# Altium PCB PCB2.PcbDoc
Units mil, origin at the board's own origin, x right, y up, seen from the top; angles counter-clockwise.
Board outline 1574.8 x 1400.79 mil, 4 copper layers (Top Layer, PWR02, GND03, Bottom Layer), stack 30.634 mil thick; 65 components, 63 nets, 285 pads, 63 vias.
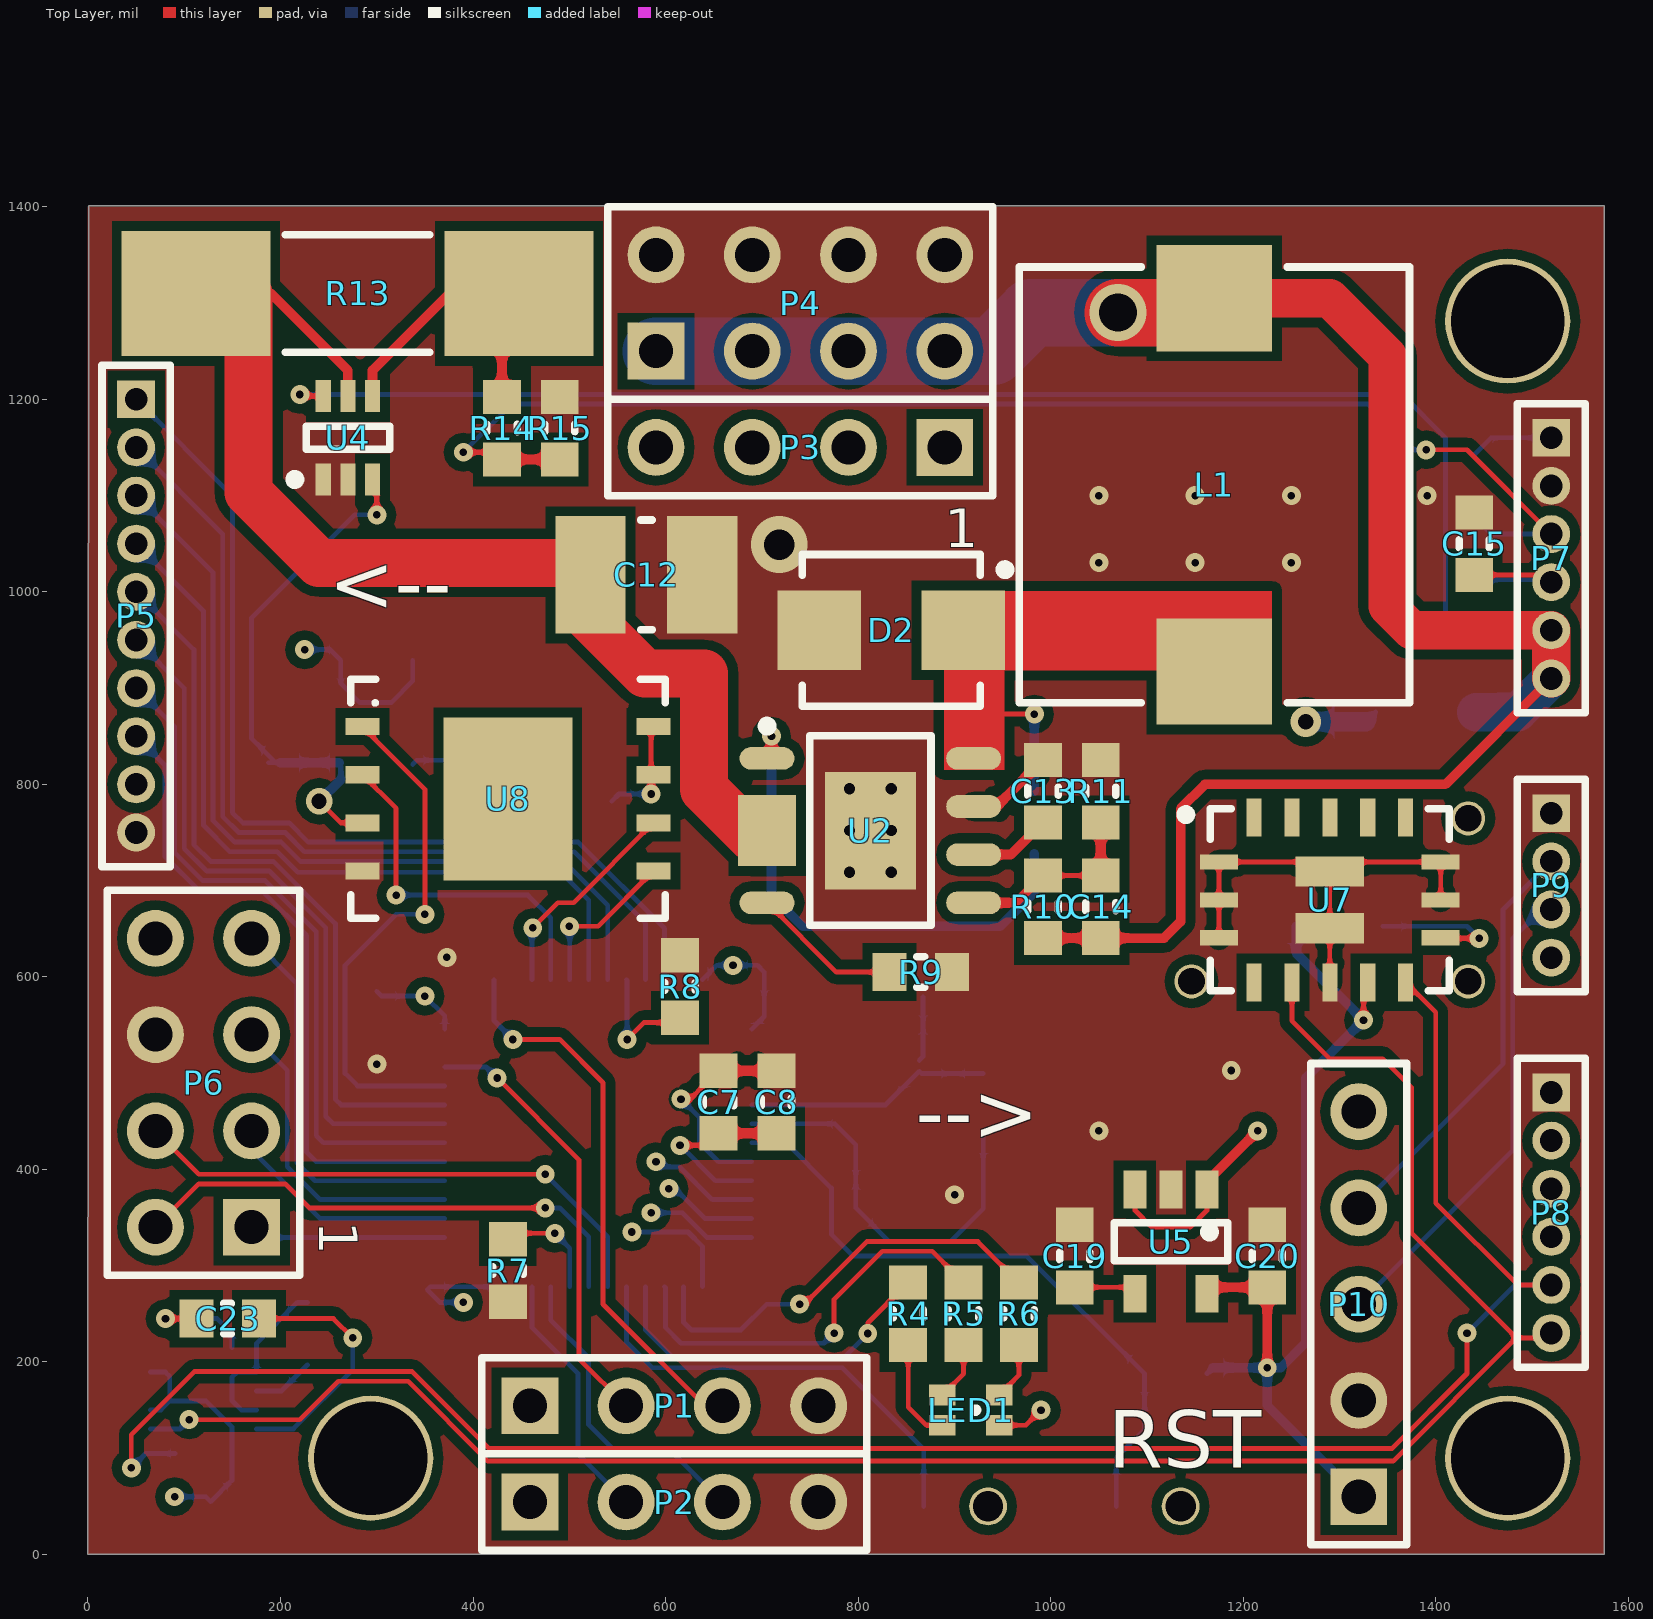
[diagram p0: Top Layer view]
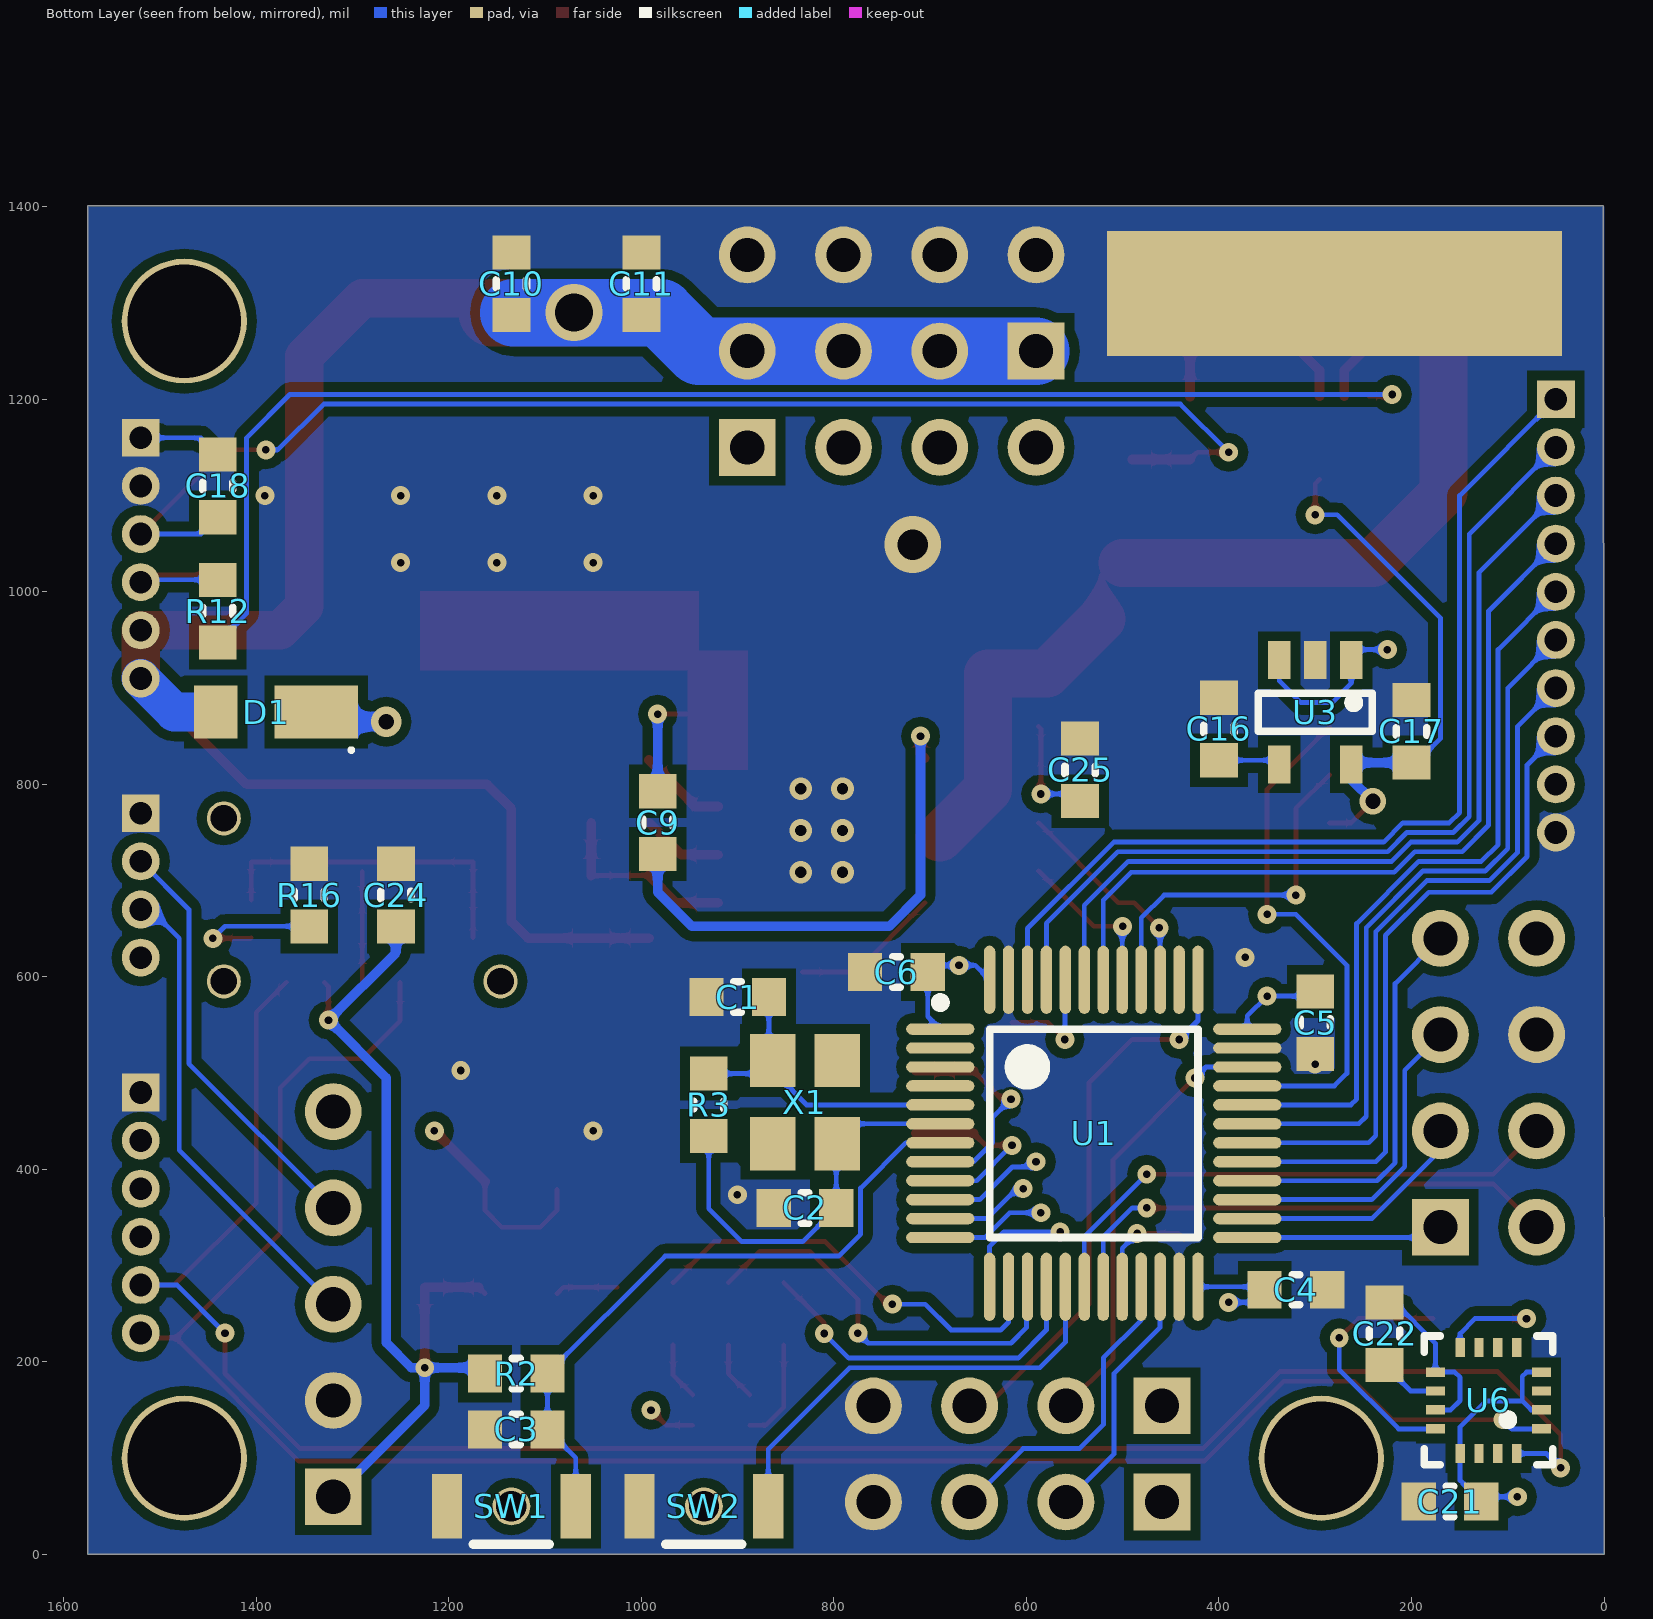
[diagram p1: Bottom Layer view, seen from below]
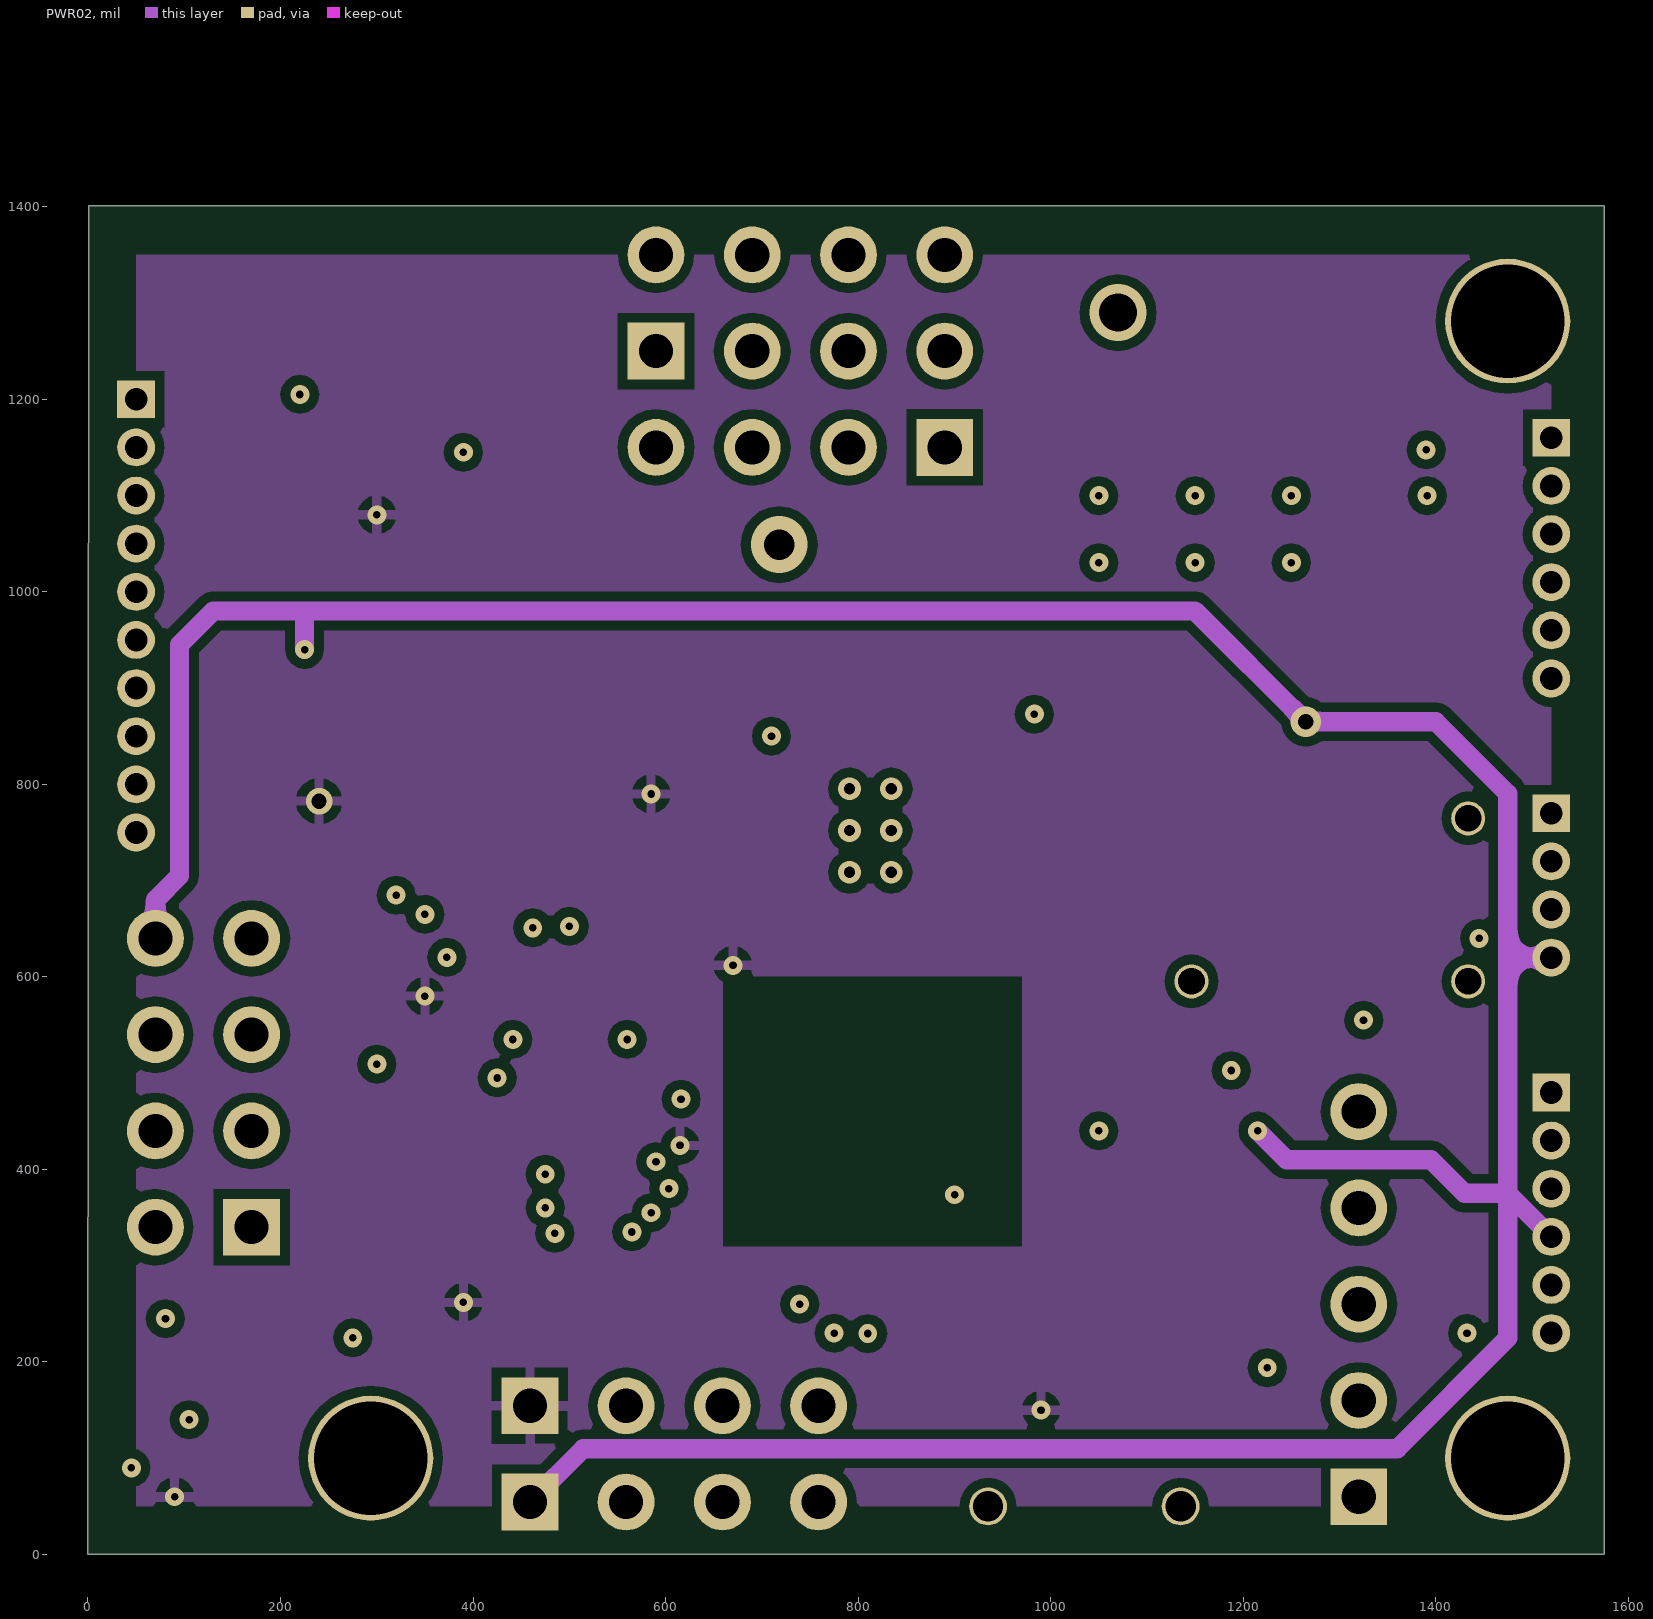
[diagram p2: PWR02]
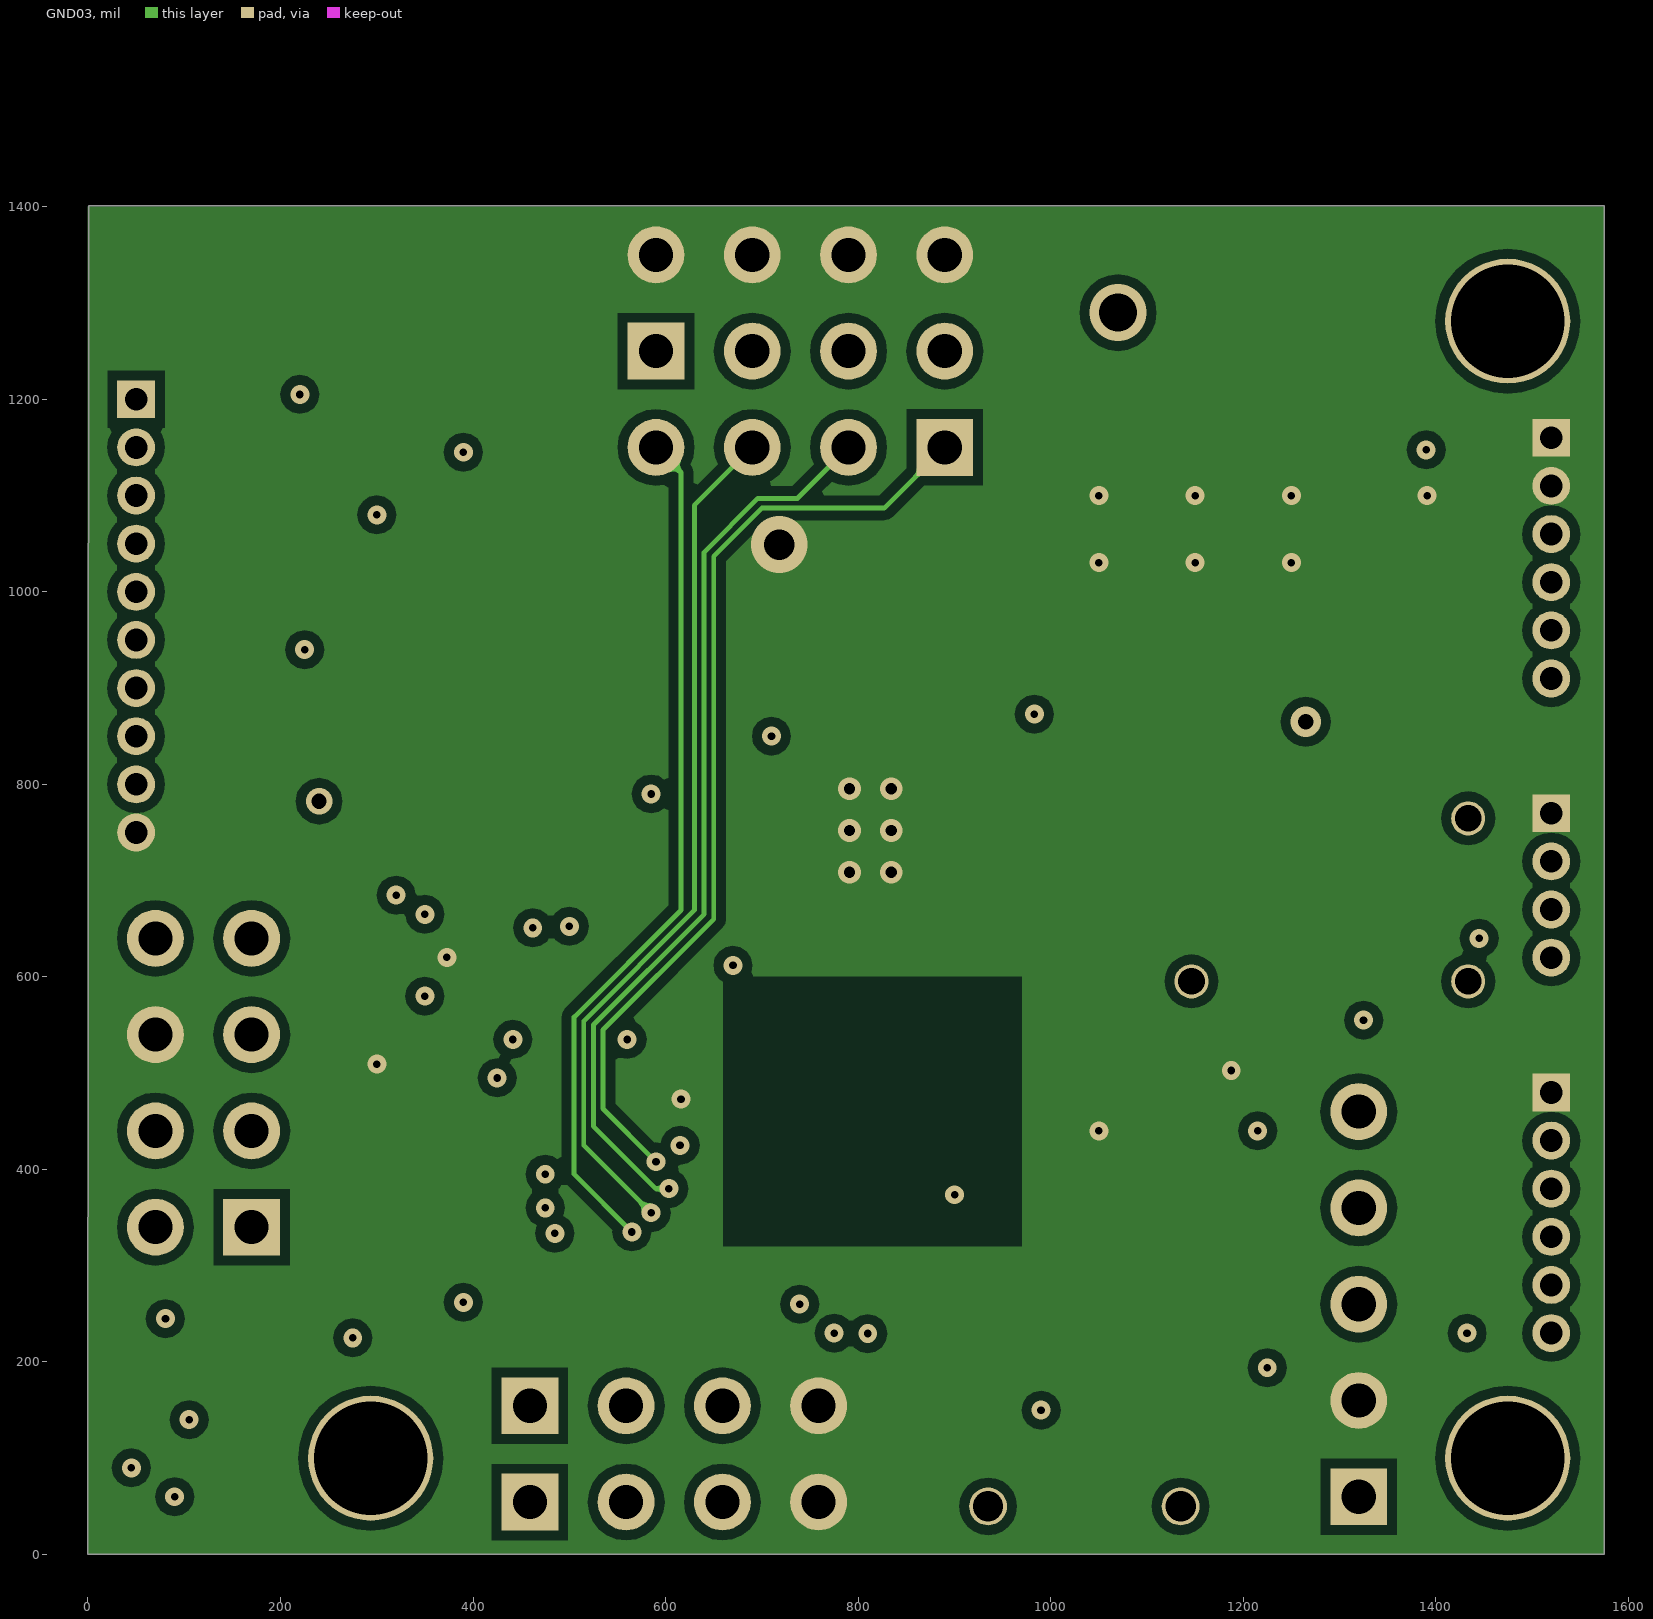
[diagram p3: GND03]

## Layer stack, top to bottom
Top Solder: solder mask 0.4, Solder Resist, Dk 3.5
Top Layer: signal copper 1.4
Dielectric 1: core 10, FR-4, Dk 4.2
PWR02: signal copper 1.417
Dielectric 3: prepreg 5, Dk 4.2
GND03: signal copper 1.417
Dielectric 2: core 10, Dk 4.2
Bottom Layer: signal copper 1.4
Bottom Solder: solder mask 0.4, Solder Resist, Dk 3.5

## Board outline
0,0 1574.8,0 1574.8,1400.79 0.79,1400.79

## Design rules (kind name [scope] priority, off if disabled: settings)
Clearance [All] p1: gap=5 ignorepadtopadclearanceinfootprint=FALSE except(0: Arc-Hole Track-Hole SMDPad-Hole THPad-Hole Via-Hole Fill-Hole Poly-Hole Region-Hole Text-Hole; 10: Arc-Fill Arc-Poly Arc-Region Track-Fill Track-Poly Track-Region SMDPad-Fill SMDPad-Poly SMDPad-Region THPad-Fill THPad-Poly THPad-Region Via-Fill Via-Poly Via-Region Fill-Fill Fill-Poly Fill-Region Poly-Poly Poly-Region Region-Region)
PolygonConnect PolygonConnect_2 [All vs IsNamedPolygon('Top Layer-GND') Or  IsNamedPolygon('Bottom Layer-GND')] p1: connectstyle=Direct reliefconductorwidth=10 reliefentries=4 polygonreliefangle="90 Angle" airgapwidth=10
PolygonConnect PolygonConnect_1 [All vs IsNamedPolygon('GND03-GND')] p2: connectstyle=Direct reliefconductorwidth=10 reliefentries=4 polygonreliefangle="90 Angle" airgapwidth=10
PolygonConnect [All] p3: connectstyle=Relief reliefconductorwidth=10 reliefentries=4 polygonreliefangle="90 Angle" airgapwidth=10
RoutingVias [All] p1: holewidth=7.87 width=19.68 viastyle="Through Hole" minholewidth=7.87 minwidth=19.68 maxholewidth=78.74 maxwidth=118.11
SolderMaskExpansion [All] p1: expansion=4
Width [All] p1: maxlimit=200 minlimit=5 preferedwidth=20 toplayer_prefwidth=5 midlayer1_maxwidth=50 midlayer2_maxwidth=50 midlayer2_prefwidth=5 bottomlayer_prefwidth=5 minimp=50.000000 maximp=50.000000 favimp=50.000000
30 further rules are at their usual default settings.

## Components (designator, comment, footprint, x,y, rotation, side; value= is the part's Value field where it differs from the comment)
C1 "20pF" 0603 900,579.02 r0 bottom
C2 "20pF" 0603 830,360 r0 bottom
C3 "1uF" 0603 1130,130 r0 bottom
C4 "100nF" 0603 320,275 r0 bottom
C5 "100nF" 0603 300,552.52 r90 bottom
C6 "100nF" 0603 735,605 r180 bottom
C7 "100nF" 0603 655,470 r90 top
C8 "10uF" 0603 715,470 r90 top
C9 "100nF" 0603 983,760.31 r90 bottom
C10 "22uF" 0603 1135,1320 r270 bottom
C11 "22uF" 0603 1000,1320 r270 bottom
C12 "10uF" 1210 580,1017.52 r180 top
C13 "8.2nF" 0603 992,792.79 r270 top
C14 "330pF" 0603 1052,672.79 r270 top
C15 "1uF" 0603 1440,1050 r90 top
C16 "470pF" 0603 400,857.52 r270 bottom
C17 "2.2uF" 0603 200,855 r270 bottom
C18 "100nF" 0603 1440,1110 r270 bottom
C19 "470pF" 0603 1025,310 r270 top
C20 "2.2uF" 0603 1225,310 r270 top
C21 "100nF" 0603 160,55 r0 bottom
C22 "4.7uF" 0603 228,229.39 r270 bottom
C23 "0.22uF" 0603 145,245 r0 top
C24 "100nF" 0603 1255,685 r90 bottom
C25 "100nF" 0603 544.14,815 r270 bottom
D1 "DFLS130L-7" PowerDI123 1380,875 r0 bottom
D2 "SK1045B" "SMB (DO-214AA)" 834.37,960 r0 top
L1 "Inductor" Ind1040 1170,1111 r90 top
LED1 "RGB_CA" RGB1.6*1.6 917,150 r90 top
P1 "Header 4" HDR1X4 459,154.47 r0 top
P2 "Header 4" HDR1X4 459,54.47 r0 top
P3 "Header 4" HDR1X4 890,1150 r180 top
P4 "Header 4X2" HDR2X4 590,1250 r0 top
P5 "MHDR1X10" MHDR1X10 50,1200 r270 top
P6 "Header 4X2" HDR2X4 170,340 r90 top
P7 "MHDR1X6" MHDR1X6 1520,1160 r270 top
P8 "MHDR1X6" MHDR1X6 1520,480 r270 top
P9 "MHDR1X4" MHDR1X4 1520,770 r270 top
P10 "Header 5" HDR1X5 1320,60 r90 top
R2 "10k" 0603 1130,187.86 r0 bottom
R3 "1M" 0603 930,467.05 r90 bottom
R4 "1k" 0603 852,250 r90 top
R5 "1k" 0603 909.52,250 r90 top
R6 "1k" 0603 967,250 r90 top
R7 "10k" 0603 436.18,295 r270 top
R8 "10k" 0603 615,590 r270 top
R9 "20k" 0603 865,605 r180 top
R10 "91k" 0603 992,672.79 r270 top
R11 "15k" 0603 1052,792.79 r270 top
R12 "680" 0603 1440,980 r90 bottom
R13 "1mR" 2512 280,1310 r180 top
R14 "4.7k" 0603 430,1170 r90 top
R15 "1k" 0603 490,1170 r270 top
R16 "0R" 0603 1345,685 r270 bottom
SW1 "Btn" BTN_B3U_B 1135,50 r0 bottom
SW2 "Btn" BTN_B3U_B 935,50 r0 bottom
U1 "STM32F103C8T6" LQFP48_N 530,437.52 r180 bottom
U2 "LMR14030 EZ" SOP8-Pad 812.72,752 r0 top
U3 "MIC5219" SOT23-5 300,874.88 r270 bottom
U4 "INA190" SC70 270,1160 r90 top
U5 "MIC5219" SOT23-5 1125,325 r270 top
U6 "QMC5883L" QMC5883 120,160 r0 bottom
U7 "SDP3x_D" SDP3x 1290,680 r0 top
U8 "W25Q128VE" WSON8-8x6mm 436.18,785 r0 top
X1 "8M" XTAL-3225-4 830,470 r90 bottom

## Footprints (in the part's own frame and the unit in brackets; to place one, negate y for a bottom-side part, rotate by r counter-clockwise, add the part's x,y. Pads: shape width x height; smd on the part's side, far side on the other; paste and mask are expansions set on the pad)
0603 [mm]
  rect 0.9x1 smd: 1(-0.825,0) 2(0.825,0)
  silkscreen extent -0.1,-0.4 0.1,0.4
1210 [mm]
  rect 1.85x3.1 smd: 1(-1.475,0) 2(1.475,0)
  silkscreen extent -0.15,-1.45 0.15,1.45
2512 [mm]
  rect 1.15x3.3 smd: 1(-2.875,0) 2(2.875,0)
  silkscreen extent -1.9,-1.55 1.9,1.55, body extent -3.3,-1.7 3.3,1.7, height 0.65
BTN_B3U_B [mm]
  rect 0.8x1.7 smd: 1(-1.7,0) 2(1.7,0)
  round 1 hole 0.8: ""(0,0)
  silkscreen extent -1,1 1,1
HDR1X4 [mm] "Connector; Header; 4 Position"
  rect 1.5x1.5 hole 0.9: 1(0,0)
  round 1.5 hole 0.9: 2(2.54,0) 3(5.08,0) 4(7.62,0)
  silkscreen extent -1.27,-1.27 8.89,1.27
HDR1X5 [mm] "Connector; Header; 5 Position"
  rect 1.5x1.5 hole 0.9: 1(0,0)
  round 1.5 hole 0.9: 2(2.54,0) 3(5.08,0) 4(7.62,0) 5(10.16,0)
  silkscreen extent -1.27,-1.27 11.43,1.27
HDR2X4 [mm] "Connector; Header; 4x2 Position"
  rect 1.5x1.5 hole 0.9: 1(0,0)
  round 1.5 hole 0.9: 2(0,2.54) 3(2.54,0) 4(2.54,2.54) 5(5.08,0) 6(5.08,2.54) 7(7.62,0) 8(7.62,2.54)
  silkscreen extent -1.27,-1.27 8.89,3.81
Ind1040 [mm] "Inductor 11.5*10*4"
  rect 2.8x3.05 smd: 1(-4.925,0) 2(4.925,0)
  silkscreen extent -5.75,-5.15 5.75,5.15
LQFP48_N [mm] "Thin QFP, 48-Leads, Body 7x7mm, Pitch 0.5mm, IPC Medium Density"
  oval 1.8x0.3 smd: 1(-4.05,2.75) 2(-4.05,2.25) 3(-4.05,1.75) 4(-4.05,1.25) 5(-4.05,0.75) 6(-4.05,0.25) 7(-4.05,-0.25) 8(-4.05,-0.75) 9(-4.05,-1.25) 10(-4.05,-1.75) 11(-4.05,-2.25) 12(-4.05,-2.75) 25(4.05,-2.75) 26(4.05,-2.25) 27(4.05,-1.75) 28(4.05,-1.25) 29(4.05,-0.75) 30(4.05,-0.25) 31(4.05,0.25) 32(4.05,0.75) 33(4.05,1.25) 34(4.05,1.75) 35(4.05,2.25) 36(4.05,2.75)
  oval 0.3x1.8 smd: 13(-2.75,-4.05) 14(-2.25,-4.05) 15(-1.75,-4.05) 16(-1.25,-4.05) 17(-0.75,-4.05) 18(-0.25,-4.05) 19(0.25,-4.05) 20(0.75,-4.05) 21(1.25,-4.05) 22(1.75,-4.05) 23(2.25,-4.05) 24(2.75,-4.05) 37(2.75,4.05) 38(2.25,4.05) 39(1.75,4.05) 40(1.25,4.05) 41(0.75,4.05) 42(0.25,4.05) 43(-0.25,4.05) 44(-0.75,4.05) 45(-1.25,4.05) 46(-1.75,4.05) 47(-2.25,4.05) 48(-2.75,4.05)
  silkscreen extent -4.18,-2.75 2.75,3.57, body extent -3.5,-3.5 3.5,3.5, height 1.6
MHDR1X4 [mm] "Connector; Header; 4 Position"
  rect 1x1 hole 0.6: 1(0,0)
  round 1 hole 0.6: 2(1.27,0) 3(2.54,0) 4(3.81,0)
  silkscreen extent -0.9,-0.9 4.71,0.9
MHDR1X6 [mm] "Connector; Header; 6 Position"
  rect 1x1 hole 0.6: 1(0,0)
  round 1 hole 0.6: 2(1.27,0) 3(2.54,0) 4(3.81,0) 5(5.08,0) 6(6.35,0)
  silkscreen extent -0.9,-0.9 7.25,0.9
MHDR1X10 [mm] "Connector; Header; 10 Position"
  rect 1x1 hole 0.6: 1(0,0)
  round 1 hole 0.6: 2(1.27,0) 3(2.54,0) 4(3.81,0) 5(5.08,0) 6(6.35,0) 7(7.62,0) 8(8.89,0) 9(10.16,0) 10(11.43,0)
  silkscreen extent -0.9,-0.9 12.33,0.9
PowerDI123 [mm] "SODFL, 2-Leads, Body 1.78x3.70mm, IPC Medium Density"
  rect 1.15x1.4 smd: 1(1.575,0)
  rect 2.2x1.4 smd: 2(-1.075,0)
  silkscreen extent -2.05,0.95 -1.95,1.05
QMC5883 [mm]
  rect 0.5x0.25 smd: 1(-1.4,0.75) 2(-1.4,0.25) 3(-1.4,-0.25) 4(-1.4,-0.75) 9(1.4,-0.75) 10(1.4,-0.25) 11(1.4,0.25) 12(1.4,0.75)
  rect 0.25x0.5 smd: 5(-0.75,-1.4) 6(-0.25,-1.4) 7(0.25,-1.4) 8(0.75,-1.4) 13(0.75,1.4) 14(0.25,1.4) 15(-0.25,1.4) 16(-0.75,1.4)
  silkscreen extent -1.7,-1.7 1.7,1.7, body extent -1.55,-1.55 1.55,1.55, height 0.95
RGB1.6*1.6 [mm]
  rect 0.55x0.7 smd: 1(-0.4,0.75) 2(0.4,0.75) 3(0.4,-0.75) 4(-0.4,-0.75)
  silkscreen extent -0.08,-0.2 0.08,-0.05
SC70 [mm]
  rect 0.85x0.4 smd: 1(-1.1,0.65) 2(-1.1,0) 3(-1.1,-0.65) 4(1.1,-0.65) 5(1.1,0) 6(1.1,0.65)
  silkscreen extent -1.22,-1.1 0.3,1.52, body extent -1.2,-1.07 1.2,1.07, height 1.1
SDP3x [mm] "QFN, 16-Leads, Body 6.00x4.50mm, Pitch 1.00mm, Thermal Pad 1.80x2.60mm, IPC Low Density"
  rect 1x0.4 smd: 1(-2.925,1) 2(-2.925,0) 3(-2.925,-1) 9(2.925,-1) 10(2.925,0) 11(2.925,1)
  rect 0.4x1 smd: 4(-2,-2.175) 5(-1,-2.175) 6(0,-2.175) 7(1,-2.175) 8(2,-2.175) 12(2,2.175) 13(1,2.175) 14(0,2.175) 15(-1,2.175) 16(-2,2.175)
  round 0.9 hole 0.7: ""(-3.65,-2.15) ""(3.65,-2.15) ""(3.65,2.15)
  rect 1.8x0.8 smd: ""(0,-0.75) ""(0,0.75)
  silkscreen extent -3.92,-2.4 3.15,2.4
"SMB (DO-214AA)" [mm] "Molded Diode, 2-Leads, Body 4.38x3.62mm, IPC Medium Density"
  rect 2.2x2.1 smd: 1(-1.9,0) 2(1.9,0)
  silkscreen extent -2.35,-2 3.13,2, body extent -2.35,-1.97 2.35,1.97, height 2.4
SOP8-Pad [mm]
  oval 1.45x0.6 smd: 1(-2.725,1.905) 2(-2.725,0.635) 3(-2.725,-0.635) 4(-2.725,-1.905) 5(2.725,-1.905) 6(2.725,-0.635) 7(2.725,0.635) 8(2.725,1.905)
  rect 2.4x3.1 smd: 9(0,0)
  silkscreen extent -2.85,-2.5 1.6,2.88
SOT23-5 [mm] "SOT23, 5-Leads, Body 2.90x2.80mm, Pitch 0.95mm, IPC Medium Density"
  rect 1x0.6 smd: 1(-1.375,0.95) 2(-1.375,0) 3(-1.375,-0.95) 4(1.375,-0.95) 5(1.375,0.95)
  silkscreen extent -0.5,-1.5 0.5,1.5
WSON8-8x6mm [mm]
  rect 0.9x0.45 smd: 1(-3.84,1.905) 2(-3.84,0.635) 3(-3.84,-0.635) 4(-3.84,-1.905) 5(3.84,-1.905) 6(3.84,-0.635) 7(3.84,0.635) 8(3.84,1.905)
  rect 3.4x4.3 smd paste-1.7: 9(0,0)
  silkscreen extent -4.15,-3.15 4.15,3.15
XTAL-3225-4 [mm]
  rect 1.4x1.2 smd: 1(-1.1,-0.85) 2(1.1,0.85) ""(-1.1,0.85) ""(1.1,-0.85)

## Part data
C1 C2 C3 C4 C5 C6 C7 C8 C9 C10 C11 C12 C13 C14 C15 C16 C17 C18 C19 C20 C21 C22 C23 C24 C25: library part Cap
D1 D2: library part Diode
P1 P2 P3 P9: "Header, 4-Pin", LatestRevisionDate=17-Jul-2002, LatestRevisionNote="Re-released for DXP Platform.", Publisher="Altium Limited"
P4 P6: "Header, 4-Pin, Dual row", LatestRevisionDate=17-Jul-2002, LatestRevisionNote="Re-released for DXP Platform.", Publisher="Altium Limited"
P5: "Header, 10-Pin", LatestRevisionDate=17-Jul-2002, LatestRevisionNote="Re-released for DXP Platform.", Publisher="Altium Limited"
P7 P8: "Header, 6-Pin", LatestRevisionDate=17-Jul-2002, LatestRevisionNote="Re-released for DXP Platform.", Publisher="Altium Limited"
P10: "Header, 5-Pin", LatestRevisionDate=17-Jul-2002, LatestRevisionNote="Re-released for DXP Platform.", Publisher="Altium Limited"
R2 R3 R4 R5 R6 R7 R8 R9 R10 R11 R12 R13 R14 R15 R16: library part Res
U1: "STM32 ARM-based 32-bit MCU with 64 Kbytes Flash, 48-pin LQFP, Industrial Temperature", ComponentLink1Description="Manufacturer Link", ComponentLink1URL=www.st.com/stm32, ComponentLink2Description=Datasheet, ComponentLink2URL=http://www.st.com/stonline/products/literature/ds/13587.pdf, DatasheetVersion="rev6, Mar-2008", PackageDescription="48-Pin Low-Profile Quad Flat Pack, 7 x 7 mm Body, 0.5 mm Pitch (LQFP48)", PackageReference=LQFP48, PackageVersion=Mar-2008, Published=30-May-2008, Publisher="Altium Limited"
U8: library part W25QxxxVE/A
X1: library part XTAL

## Free pads (board coordinates)
  rect 472.44x129.92 smd far side: 2(280,1310)
  rect 60x74 smd: 3(705.43,752)
  rect 129.92x129.92 smd: ""(100,1310) ""(460,1310)
  round 129.92 hole 118.11: ""(293.7,100) ""(1474.8,100) ""(1474.8,1281.1)

## Via types
v1: diameter 19.68, hole 7.87, Top Layer to Bottom Layer, tented both sides, 53 vias
v2: diameter 23.62, hole 11.81, Top Layer to Bottom Layer, tented both sides, 6 vias
v3: diameter 59.06, hole 31.5, Top Layer to Bottom Layer, tented both sides, 1 vias
v4: diameter 27.56, hole 15.75, Top Layer to Bottom Layer, tented both sides, 1 vias
v5: diameter 31.5, hole 15.75, Top Layer to Bottom Layer, tented both sides, 1 vias
v6: diameter 59.06, hole 39.37, Top Layer to Bottom Layer, tented both sides, 1 vias

## Nets (pads, with @x,y where several pads share a name; then routed paths per layer and width w, separated by ;. In a path a pad name is that pad's centre, name@x,y a point inside that pad or via, vN(x,y) a via of type N, cw(c..) or ccw(c..) an arc to the next point about the centre after c; other vN are vias at no path point)
+5: D1.2 P2.1 P6.8 P8.4 P9.4 U3.1 U3.3 U5.1 U5.3 | length 4348.2
  Top Layer w5: U5.3 1087.6,357.4 1105,340 1145,340 1162.4,357.4 U5.1 U5.1@1162.4,387.4
  Top Layer w10: U5.1@1162.4,387.4 v1(1215,440)
  PWR02 w20: P6.8 70,680 95,705 95,945 130,980 225,980 ; v1(225,940) 225,980 ; P2.1 514.47,109.94 1359.94,109.94 1474.8,224.8 1474.8,375.2 ; v1(1215,440) 1245,410 1395,410 1429.8,375.2 1474.8,375.2 ; P8.4 1474.8,375.2 ; P9.4 1474.8,620 ; 225,980 1150,980 v5(1265,865) 1400,865 1474.8,790.2 1474.8,620 ; 1474.8,375.2 1474.8,620
  Bottom Layer w5: v1(225,940) 251.61,940 U3.1 262.6,904.88 282.48,885 315,885 337.4,907.4 U3.3 ; D1.2@1327.68,865 D1.2
  Bottom Layer w20: v5(1265,865) D1.2@1327.68,865
+5.3: C10.2 C11.2 C14.2 D1.1 L1.2 P4.1 P4.3 P4.5 P4.7 P7.5 P7.6 R10.2 | length 2164.7
  Top Layer w10: R10.2 C14.2 1117.79,640.31 1135,657.52 1135,774.82 1160.18,800 1410,800 P7.6 ; L1.2@1155.1,1290 L1.2
  Top Layer w40: L1.2 1289.9,1304.9 1350,1244.8 1350,985 1375,960 P7.5 P7.6
  Top Layer w70: v6(1070,1290) L1.2@1155.1,1290
  Bottom Layer w10: C10.2@1132.52,1290 C10.2
  Bottom Layer w40: D1.1 1485,875 P7.6
  Bottom Layer w70: P4.1 P4.3 P4.5 P4.7 940,1250 980,1290 v6(1070,1290) C10.2@1132.52,1290
ADC1: P6.4 U1.18 | length 567.4
  Top Layer w5: P6.4 115,395 v1(475,395)
  Bottom Layer w5: v1(475,395) 539.84,330.16 U1.18
ADC2: P6.2 U1.19 | length 543.4
  Top Layer w5: P6.2 115,385 205,385 230,360 v1(475,360)
  Bottom Layer w5: v1(475,360) 490,360 520.16,329.84 U1.19
BAT_IN: pad.@460,1310 R13.1 R14.2 U4.4 | length 277.4
  Top Layer w10: U4.4 295.59,1230 375.59,1310 R13.1 ; R14.2 430,1280 pad.@460,1310
BAT_OUT: C12.2 pad.3 pad.@100,1310 R13.2 U2.2 U2.3 U4.5 | length 1111.4
  Top Layer w5: C12.2@521.93,971.73 C12.2
  Top Layer w10: R13.2 190,1310 270,1230 U4.5
  Top Layer w50: R13.2 166.81,1103.19 240,1030 C12.2@500,1030 ; C12.2@521.93,971.73 578.66,915 640,915 640.08,914.92 640.08,794.92 pad.3@690,745
CS: U1.33 U8.1 | length 548.1
  Top Layer w5: U8.1 350,795 v1(350,665)
  Bottom Layer w5: v1(350,665) 320,665 267.03,612.03 267.03,499.7 280,486.73 U1.33
GND: C1.2 C2.2 C3.2 C4.1 C5.1 C6.1 C7.2 C8.2 C10.1 C11.1 C12.1 C13.1 C15.2 C16.1 C17.1 C18.1 C19.1 C20.1 C21.2 C22.1 C24.2 C25.1 D2.1 P1.4 P2.4 P4.2 P4.4 P4.6 P4.8 P5.10 P6.6 P7.1 P7.2 P8.1 P9.1 P10.2 pad.2 R7.2 R8.1 R9.1 R11.1 R15.1 R16.1 SW1.2 SW2.2 U1.8 U1.23 U1.35 U1.47 U2.7 U2.9 U3.2 U4.1 U4.2 U5.2 U6.9 U6.11 U7.1 U7.2 U7.3 U7.6 U7.10 U7.11 U7.@1290,650.47 U7.@1290,709.53 U8.4 | length 1051.6
  Top Layer w5: v1(616.03,472.97) 625.49,472.97 C7.2 ; U7.3 U7.2 U7.1 U7.11 U7.10 ; U7.6 1290,650.47 U7.@1290,709.53
  Top Layer w10: C7.2 C8.2 ; U2.7 943.73,777 C13.1
  Bottom Layer w5: U6.11 159.32,150.16 149.53,159.94 149.53,184.06 155,189.53 U6.9 175.12,219.53 217.46,261.87 C22.1 ; v1(616.03,472.97) 635,454 635,427.97 654.98,407.99 U1.8 ; C18.1 1457.52,1160 P7.1
  other v1: 900.32,373.69 1050,440.07 1187.59,502.74 300,509.31 372.73,620.18 1050,1030.23 1150,1030.23 1250,1030.23 1050,1100 1150,1100 1250,1100 1390.98,1100
  other v2: 791.06,708.69 834.37,708.69 791.06,752 834.37,752 791.06,795.31 834.37,795.31
  other v3: 718,1049
GPIO1: P6.1 U1.25 | length 205
  Bottom Layer w5: P6.1 180.75,329.25 U1.25
GPIO2: P6.3 U1.26 | length 250
  Bottom Layer w5: P6.3 170,420 241.06,348.94 U1.26
GPIO3: P6.5 U1.27 | length 330.1
  Bottom Layer w5: P6.5 207.03,502.97 207.03,402.97 241.38,368.62 U1.27
GPIO4: P6.7 U1.28 | length 413.7
  Bottom Layer w5: P6.7 217.03,592.97 217.03,407.11 235.84,388.31 U1.28
IOUT: C15.1 P7.4 R12.2 | length 164.1
  Top Layer w5: C15.1 1512.48,1017.52 P7.4
  Bottom Layer w5: R12.2 1517.52,1012.48 P7.4
KEY: SW2.1 U1.17 | length 471.6
  Bottom Layer w5: U1.17 559.53,220.47 586,194 783.62,194 868.07,109.55 SW2.1
LED1: R4.2 U1.16 | length 368.7
  Top Layer w5: v1(810,229.53) 810,240.48 R4.2
  Bottom Layer w5: U1.16 579.21,233.17 608.39,204 784.47,204 v1(810,229.53)
LED2: R5.2 U1.15 | length 432.7
  Top Layer w5: v1(775,230) 775,265 825,315 877,315 R5.2
  Bottom Layer w5: U1.15 600,276.97 600,235.55 616.03,219.53 764.53,219.53 v1(775,230)
LED3: R6.2 U1.14 | length 449.3
  Top Layer w5: v1(739.19,260) 739.19,256.81 740,256 809,325 924.48,325 R6.2
  Bottom Layer w5: U1.14 618.58,241.42 626.83,233.17 678.17,233.17 705,260 v1(739.19,260)
MISO: U1.40 U8.2 | length 374.4
  Top Layer w5: U8.2 320,775 v1(320,685)
  Bottom Layer w5: v1(320,685) 457,685 480.79,661.21 U1.40
MOSI: U1.41 U8.5 | length 166.9
  Top Layer w5: v1(500,652.52) 529.88,652.52 U8.5
  Bottom Layer w5: v1(500,652.52) 500.47,652.05 U1.41
NetC9_1: C9.1 U2.1 | length 530.9
  Top Layer w10: U2.1 710,831.57 v1(710,850)
  Bottom Layer w10: v1(710,850) 710,685 742.48,652.52 947.52,652.52 983,688 C9.1
NetC9_2: C9.2 D2.2 L1.1 U2.8 | length 135.2
  Top Layer w5: 928,873 v1(983,873)
  Bottom Layer w10: C9.2 v1(983,873)
NetC13_2: C13.2 U2.6 | length 85.8
  Top Layer w10: U2.6 958.69,727 C13.2
NetC14_1: C14.1 R10.1 R11.2 U2.5 | length 198.7
  Top Layer w5: R10.1 C14.1
  Top Layer w10: U2.5 963.73,677 R10.1 ; C14.1 R11.2
NetC16_2: C16.2 U3.4 | length 64.4
  Bottom Layer w5: U3.4 341.69,825.04 C16.2
NetC19_2: C19.2 U5.4 | length 65.4
  Top Layer w5: C19.2 1080.95,277.52 U5.4
NetC22_2: C22.2 U6.10 | length 64.1
  Bottom Layer w5: U6.10 200.93,169.84 C22.2
NetC23_1: C23.1 U6.8 | length 121.9
  Top Layer w5: v1(80.47,245) C23.1
  Bottom Layer w5: v1(80.47,245) 134.06,245 149.53,229.53 U6.8
NetC23_2: C23.2 U6.12 | length 264.2
  Top Layer w5: C23.2 255,245 v1(275,225)
  Bottom Layer w5: U6.12 213.44,130.47 275,192.03 v1(275,225)
NetLED1_1: LED1.1 R4.1 | length 107.8
  Top Layer w5: R4.1 852,153 870.75,134.25 LED1.1
NetLED1_2: LED1.2 R5.1 | length 60.9
  Top Layer w5: LED1.2 909.52,187.8 R5.1
NetLED1_3: LED1.3 R6.1 | length 60.3
  Top Layer w5: LED1.3 967,186.22 R6.1
NetR7_1: R7.1 U1.20 | length 113.3
  Top Layer w5: R7.1 442.33,333.63 v1(485,333.63)
  Bottom Layer w5: v1(485,333.63) 500.47,318.15 U1.20
NetR8_2: R8.2 U1.44 | length 124.4
  Top Layer w5: v1(560,535) 577.52,552.52 R8.2@615,552.52
  Bottom Layer w5: U1.44 560,596.5 v1(560,535)
NetR9_2: R9.2 U2.4 | length 156.9
  Top Layer w5: U2.4 777.43,605 R9.2
NetR12_1: R12.1 U4.6 | length 1458.7
  Top Layer w5: v1(220,1205) 221.69,1203.31 U4.6
  Bottom Layer w5: v1(220,1205) 1365,1205 1410,1160 1410,977.52 R12.1
NetR16_2: R16.2 U7.9 | length 145.3
  Top Layer w5: U7.9 1405.79,640 v1(1445,640)
  Bottom Layer w5: R16.2 1432.48,652.52 v1(1445,640)
OSC_IN: C1.1 R3.2 U1.5 X1.2 | length 323.5
  Bottom Layer w5: U1.5 828.44,467.05 863.46,502.07 866,499.53 R3.2 ; X1.2 867.52,517.36 C1.1
OSC_OUT: C2.1 R3.1 U1.6 X1.1 | length 419.2
  Bottom Layer w5: U1.6 775.87,447.36 X1.1 797.52,425.71 C2.1 832.52,325 895.75,325 930,359.25 R3.1
PWM_IN1: P5.8 U1.29 | length 691.1
  Bottom Layer w5: P5.8 80,820 80,725 117,688 182,688 227.03,642.97 227.03,417.97 237.01,407.99 U1.29
PWM_IN2: P5.7 U1.30 | length 717.1
  Bottom Layer w5: P5.7 90,860 90,729.14 119.14,700 184.14,700 237.03,647.11 237.03,435 244.35,427.68 U1.30
PWM_IN3: P5.6 U1.31 | length 741.4
  Bottom Layer w5: P5.6 100,900 100,733.28 123.28,710 188.28,710 247.03,651.26 247.03,455 254.67,447.36 U1.31
PWM_IN4: P5.5 U1.32 | length 766.8
  Bottom Layer w5: P5.5 110,940 110,737.43 127.43,720 192.43,720 257.03,655.4 257.03,472.97 262.95,467.05 U1.32
PWM_IN5: P5.4 U1.42 | length 836.7
  Bottom Layer w5: P5.4 120,980 120,757.43 147.43,730 196.57,730 217.88,708.69 491.31,708.69 520.16,679.84 U1.42
PWM_IN6: P5.3 U1.43 | length 894.4
  Bottom Layer w5: P5.3 130,1020 130,762.43 152.43,740 200.71,740 220.71,720 494.14,720 539.84,674.3 U1.43
PWM_IN7: P5.2 U1.45 | length 964.6
  Bottom Layer w5: P5.2 140,1060 140,766.57 156.57,750 204.85,750 224.85,730 505,730 579.21,655.79 U1.45
PWM_IN8: P5.1 U1.46 | length 1022.8
  Bottom Layer w5: P5.1 150,1100 150,770.71 160.71,760 208.99,760 228.99,740 509.14,740 598.9,650.24 U1.46
PWM_OUT1: P3.1 U1.10 | length 1102
  GND03 w5: v1(590,407.99) 535,462.99 535,545 650,660 650,1037 700,1087 827,1087 P3.1
  Bottom Layer w5: v1(590,407.99) 595.33,402.66 614.46,402.66 648.49,368.62 U1.10
PWM_OUT2: P3.2 U1.11 | length 1043.1
  GND03 w5: v1(603.47,380) 590,380 525,445 525,550 640,665 640,1041.14 695.86,1097 737,1097 P3.2
  Bottom Layer w5: v1(603.47,380) 610,380 641.06,348.94 U1.11
PWM_OUT3: P3.3 U1.12 | length 1011.6
  GND03 w5: v1(585,355) 515,425 515,554.14 630,669.14 630,1090 P3.3
  Bottom Layer w5: v1(585,355) 617.41,355 643.16,329.25 U1.12
PWM_OUT4: P3.4 U1.13 | length 1018
  GND03 w5: v1(565,335) 505,395 505,558.28 616.03,669.31 616.03,1123.97 P3.4
  Bottom Layer w5: v1(565,335) 623.27,335 638.27,320 U1.13
RST: C3.1 R2.1 SW1.1 U1.7 | length 685.5
  Bottom Layer w5: U1.7 725.3,427.68 772.3,380.67 772.3,332.81 795.12,310 975.38,310 R2.1 C3.1 1068.07,100.55 SW1.1
RX: P2.2 U1.22 | length 264.1
  Bottom Layer w5: U1.22 461.1,235.9 509.14,187.86 509.14,104.33 P2.2
SCK: U1.39 U8.6 | length 224.9
  Top Layer w5: v1(462,651) 488,677 504.36,677 U8.6
  Bottom Layer w5: U1.39 461.1,650.1 v1(462,651)
SCL: P8.6 U6.1 U7.5 | length 2066.1
  Top Layer w5: v1(105,140) 220,140 260,180 332.52,180 415.49,97.03 1355.65,97.03 1483.63,225 ; U7.5 1250.63,554.37 1290,515 1345,515 1375,485 1375,333.63 1483.63,225 ; P8.6 1520,225 1483.63,225
  Bottom Layer w5: U6.1 95.47,130.47 v1(105,140)
SDA: P8.5 U6.16 U7.8 | length 2113.9
  Top Layer w5: v1(45,90) 45,124.47 110.53,190 336.66,190 416.66,110 1354.48,110 1432.5,188.02 v1(1432.5,230) ; U7.8 1400,563.11 1400,365 1485,280 P8.5
  Bottom Layer w5: v1(45,90) 59.88,104.88 U6.16 ; v1(1432.5,230) 1482.5,280 P8.5
SWCLK: P1.3 U1.37 | length 580.1
  Top Layer w5: v1(441.42,535) 490,535 535,490 535,260 640.53,154.47 P1.3
  Bottom Layer w5: U1.37 421.73,554.68 v1(441.42,535)
SWDIO: P1.2 U1.34 | length 455.2
  Top Layer w5: v1(425,495) 510,410 510,203.47 P1.2
  Bottom Layer w5: U1.34 413.58,506.42 v1(425,495)
TEL_RX: P9.3 P10.3 | length 498.7
  Bottom Layer w5: P10.3 1480,420 1480,640 1510,670 P9.3
TEL_TX: P9.2 P10.4 | length 442.8
  Bottom Layer w5: P10.4 1470,510 1470,670 P9.2
TX: P2.3 U1.21 | length 331.7
  Bottom Layer w5: U1.21 480.79,243.47 520,204.26 520,135 545,110 603.47,110 P2.3
UOUT: C18.2 P7.3 R14.1 R15.2 | length 1397
  Top Layer w5: v1(390,1145) 422.52,1145 R14.1 ; v1(1390,1147.5) 1432.5,1147.5 P7.3
  Top Layer w10: R14.1 R15.2
  Bottom Layer w5: v1(390,1145) 440,1195 1330,1195 1377.5,1147.5 v1(1390,1147.5) ; C18.2 1457.52,1060 P7.3
VCC: C4.2 C5.2 C6.2 C7.1 C8.1 C17.2 C21.1 C25.2 LED1.4 P1.1 U1.1 U1.9 U1.24 U1.36 U1.48 U3.5 U4.3 U6.2 U6.4 U6.13 U8.3 U8.7 U8.8 | length 1530.9
  Top Layer w5: v4(240,782.52) 262.52,760 U8.3 ; U4.3 300,1112.28 v1(300,1080) ; v1(585,790) 585,857.64 U8.8 ; v1(615,425) 642.48,425 C7.1 ; LED1.4 974.25,134.25 v1(990,150)
  Top Layer w10: C7.1 C8.1
  Bottom Layer w5: U6.2 75.68,150.16 85,159.47 ; U6.4 80.47,189.53 85,185 85,159.47 ; v1(90,60) 122.52,60 C21.1 149.53,77.01 U6.13 149.53,132.46 122.52,159.47 85,159.47 ; C17.2@187.48,822.52 C17.2@194.96,822.52 ; C17.2 C17.2@194.96,822.52 ; U3.5@260.83,822.52 U3.5 U3.5@262.6,805.12 ; C5.2 305,580 v1(350,580) 370.55,559.45 U1.36 ; v1(300,1080) 277.03,1080 170,972.97 170,847.48 C17.2@194.96,822.52 ; v1(390,261.87) 365.61,261.87 C4.2 355.55,278.07 U1.24 ; C25.2 551.62,790 v1(585,790) ; v1(615,425) 651.69,388.31 U1.9 ; U1.48 653.33,612.03 v1(670,612.03) 695.49,612.03 C6.2 702.52,558.86 U1.1
  Bottom Layer w10: C17.2 U3.5@260.83,822.52 ; v4(240,782.52) U3.5@262.6,805.12
VCC_TEL: C20.2 C24.1 P10.1 R2.2 U5.5 U7.7 | length 965.6
  Top Layer w5: U5.5 U5.5@1169.06,277.52 ; v1(1325,555) 1325,590 U7.7
  Top Layer w10: U5.5@1169.06,277.52 C20.2 v1(1225,194)
  Bottom Layer w5: R2.2 R2.2@1168.62,194
  Bottom Layer w10: R2.2@1168.62,194 v1(1225,194) ; C24.1 1255,625 v1(1325,555) 1265,495 1265,220 1239,194 v1(1225,194) ; P10.1 1225,155 v1(1225,194)
pads on no net: P5.9 P8.2 P8.3 P10.5 SW1. SW2. U1.2 U1.3 U1.4 U1.38 U6.3 U6.5 U6.6 U6.7 U6.14 U6.15 U7.4 U7.12 U7.13 U7.14 U7.15 U7.16 U7.@1146.3,595.35 U7.@1433.7,595.35 U7.@1433.7,764.65 U8.9 X1.

## Polygon pours and split planes (outlines as drawn)
VCC on PWR02 "PWR02-VCC" (solid, pour order 0): 50,1350 1520,1350 1520,50 50,50
GND on GND03 "GND03-GND" (solid, pour order 4): 0,1400 1574.8,1400 1574.8,0 0,0
GND on Bottom Layer "Bottom Layer-GND" (solid, pour order 10): 0,1400 1574.8,1400 1574.8,0 0,0
GND on Top Layer "Top Layer-GND" (solid, pour order 12): 0,1400 1574.8,1400 1574.8,0 0,0

## Other copper
Top Layer:
  rectangle net NetC9_2: 940,918.32 1230,1001
  rectangle net NetC9_2: 889,815 952,939
  region: 940,1010
PWR02:
  pour cut-out: 660,600 970,600 970,320 660,320
GND03:
  pour cut-out: 660,600 970,600 970,320 660,320

## Silkscreen, mask and mechanical layers (free items; w line width, h text height)
Top Overlay:
  text "1" at 890,1046.06 h40
  text "<--" at 250,980 h60
  text "-->" at 860,430 h60
  text "1" at 240,346.34 h40 r270
  text "RST" at 1060,90 h60
Mechanical 1:
  lines w10: 0,0 1574.8,0 1574.8,1400.79 0.79,1400.79 0.79,0.79